# EAGLE board TestBench (EAGLE 6.5.0)

Size 140 x 138.5 mm. Coordinates in mm from the lower left corner, seen from the top.
Outline: 14.96,133.5 14.96,132.5
Outline: 20.04,133.5 20.04,129.96
Outline: 25.12,133.5 25.12,132.5
Outline: 30.2,133.5 30.2,129.96
Outline: 9.88,133.5 9.88,132.5
Outline: 35.28,133.5 35.28,132.5
Outline: 40.36,133.5 40.36,129.96
Outline: 45.44,133.5 45.44,132.5
Outline: 50.52,133.5 50.52,129.96
Outline: 55.6,133.5 55.6,132.5
Outline: 60.68,133.5 60.68,129.96
Outline: 65.76,133.5 65.76,132.5
Outline: 75.92,133.5 75.92,132.5
Outline: 70.84,133.5 70.84,129.96
Outline: 81,133.5 81,129.96
Outline: 86.08,133.5 86.08,132.5
Outline: 91.16,133.5 91.16,129.96
Outline: 96.24,133.5 96.24,132.5
Outline: 101.32,133.5 101.32,129.96
Outline: 14.96,6.1 14.96,5.1
Outline: 20.04,8.64 20.04,5.1
Outline: 25.12,6.1 25.12,5.1
Outline: 30.2,8.64 30.2,5.1
Outline: 35.28,6.1 35.28,5.1
Outline: 40.36,8.64 40.36,5.1
Outline: 45.44,6.1 45.44,5.1
Outline: 50.52,8.64 50.52,5.1
Outline: 55.6,6.1 55.6,5.1
Outline: 60.68,8.64 60.68,5.1
Outline: 65.76,6.1 65.76,5.1
Outline: 75.92,6.1 75.92,5.1
Outline: 70.84,8.64 70.84,5.1
Outline: 81,8.64 81,5.1
Outline: 86.08,6.1 86.08,5.1
Outline: 91.16,8.64 91.16,5.1
Outline: 96.24,6.1 96.24,5.1
Outline: 101.32,8.64 101.32,5.1
Outline: 9.88,8.64 9.88,5.1
Outline: 0,135.5 0,3 arc90 3,0 137,0 arc90 140,3 140,135.5 arc90 137,138.5 3,138.5 arc90 0,135.5
Outline: 10,15 10,123.5 101.32,123.5 101.32,15 10,15
Copper layers (1*16): Top 0.035mm / dielectric 1.5mm / Bottom 0.035mm
Design rules "default": minimum track width 10mil, minimum drill 24mil, track to track 8mil, track to pad 8mil, pad to pad 8mil, via to via 8mil, smd to smd 8mil, copper to edge 40mil, drill to drill 8mil, minimum pad ring 10mil, minimum via ring 8mil, stop-mask expansion 4mil, vias tented up to drill 0mil, thermal gap 10mil
Holes 3.2 mm at 3,135.5 137,135.5 70,3 3,3 70,135.5 137,3 12.42,8 12.42,130.5 17.5,8 17.5,130.5 22.58,8 22.58,130.5 27.66,8 27.66,130.5 32.74,8 32.74,130.5 37.82,8 37.82,130.5 42.9,8 42.9,130.5 47.98,8 47.98,130.5 53.06,8 53.06,130.5 58.14,8 58.14,130.5 63.22,8 63.22,130.5 68.3,8 68.3,130.5 73.38,8 73.38,130.5 78.46,8 78.46,130.5 83.54,8 83.54,130.5 88.62,8 88.62,130.5 93.7,8 93.7,130.5 98.78,8 98.78,130.5

## Footprints (pad centres in the part's own frame; a part is rotated, then mirrored left to right if it is on the bottom)
DC_BARREL_JACK_PTH_2MM = drill 3.5: P1 0,6.475 | drill 3: P2 4.9,3.525; P3 0,0.475
POWER_16 = drill 1.016 pad 1.88 octagon: 1 -6.35,-1.27; 2 -6.35,1.27; 3 -3.81,-1.27; 4 -3.81,1.27; 5 -1.27,-1.27; 6 -1.27,1.27; 7 1.27,-1.27; 8 1.27,1.27; 9 3.81,-1.27; 10 3.81,1.27; 11 6.35,-1.27; 12 6.35,1.27; 13 8.89,-1.27; 14 8.89,1.27; 15 11.43,-1.27; 16 11.43,1.27
PROTO_10_24 = drill 1 square: 1 -13.97,-11.43; 2 -11.43,-11.43; 3 -8.89,-11.43; 4 -6.35,-11.43; 5 -3.81,-11.43; 6 -1.27,-11.43; 7 1.27,-11.43; 8 3.81,-11.43; 9 6.35,-11.43; 10 8.89,-11.43; 11 11.43,-11.43; 12 13.97,-11.43; 25 -13.97,-8.89; 26 -11.43,-8.89; 27 -8.89,-8.89; 28 -6.35,-8.89; 29 -3.81,-8.89; 30 -1.27,-8.89; 31 1.27,-8.89; 32 3.81,-8.89; 33 6.35,-8.89; 34 8.89,-8.89; 35 11.43,-8.89; 36 13.97,-8.89; 49 -13.97,-6.35; 50 -11.43,-6.35; 51 -8.89,-6.35; 52 -6.35,-6.35; 53 -3.81,-6.35; 54 -1.27,-6.35; 55 1.27,-6.35; 56 3.81,-6.35; 57 6.35,-6.35; 58 8.89,-6.35; 59 11.43,-6.35; 60 13.97,-6.35; 73 -13.97,-3.81; 74 -11.43,-3.81; 75 -8.89,-3.81; 76 -6.35,-3.81; 77 -3.81,-3.81; 78 -1.27,-3.81; 79 1.27,-3.81; 80 3.81,-3.81; 81 6.35,-3.81; 82 8.89,-3.81; 83 11.43,-3.81; 84 13.97,-3.81; 97 -13.97,-1.27; 98 -11.43,-1.27; 99 -8.89,-1.27; 100 -6.35,-1.27; 101 -3.81,-1.27; 102 -1.27,-1.27; 103 1.27,-1.27; 104 3.81,-1.27; 105 6.35,-1.27; 106 8.89,-1.27; 107 11.43,-1.27; 108 13.97,-1.27; 121 -13.97,1.27; 122 -11.43,1.27; 123 -8.89,1.27; 124 -6.35,1.27; 125 -3.81,1.27; 126 -1.27,1.27; 127 1.27,1.27; 128 3.81,1.27; 129 6.35,1.27; 130 8.89,1.27; 131 11.43,1.27; 132 13.97,1.27; 145 -13.97,3.81; 146 -11.43,3.81; 147 -8.89,3.81; 148 -6.35,3.81; 149 -3.81,3.81; 150 -1.27,3.81; 151 1.27,3.81; 152 3.81,3.81; 153 6.35,3.81; 154 8.89,3.81; 155 11.43,3.81; 156 13.97,3.81; 169 -13.97,6.35; 170 -11.43,6.35; 171 -8.89,6.35; 172 -6.35,6.35; 173 -3.81,6.35; 174 -1.27,6.35; 175 1.27,6.35; 176 3.81,6.35; 177 6.35,6.35; 178 8.89,6.35; 179 11.43,6.35; 180 13.97,6.35; 193 -13.97,8.89; 194 -11.43,8.89; 195 -8.89,8.89; 196 -6.35,8.89; 197 -3.81,8.89; 198 -1.27,8.89; 199 1.27,8.89; 200 3.81,8.89; 201 6.35,8.89; 202 8.89,8.89; 203 11.43,8.89; 204 13.97,8.89; 217 -13.97,11.43; 218 -11.43,11.43; 219 -8.89,11.43; 220 -6.35,11.43; 221 -3.81,11.43; 222 -1.27,11.43; 223 1.27,11.43; 224 3.81,11.43; 225 6.35,11.43; 226 8.89,11.43; 227 11.43,11.43; 228 13.97,11.43; G30 -13.97,13.97; G31 -11.43,13.97; G32 -8.89,13.97; G33 -6.35,13.97; G34 -3.81,13.97; G35 -1.27,13.97; G36 1.27,13.97; G37 3.81,13.97; G38 6.35,13.97; G39 8.89,13.97; G40 -13.97,-13.97; G41 -11.43,-13.97; G42 -8.89,-13.97; G43 -6.35,-13.97; G44 -3.81,-13.97; G45 -1.27,-13.97; G46 1.27,-13.97; G47 3.81,-13.97; G48 6.35,-13.97; G49 8.89,-13.97; G310 11.43,13.97; G311 13.97,13.97; G410 11.43,-13.97; G411 13.97,-13.97; V30 -13.97,16.51; V31 -11.43,16.51; V32 -8.89,16.51; V33 -6.35,16.51; V34 -3.81,16.51; V35 -1.27,16.51; V36 1.27,16.51; V37 3.81,16.51; V38 6.35,16.51; V39 8.89,16.51; V40 -13.97,-16.51; V41 -11.43,-16.51; V42 -8.89,-16.51; V43 -6.35,-16.51; V44 -3.81,-16.51; V45 -1.27,-16.51; V46 1.27,-16.51; V47 3.81,-16.51; V48 6.35,-16.51; V49 8.89,-16.51; V310 11.43,16.51; V311 13.97,16.51; V410 11.43,-16.51; V411 13.97,-16.51
OG-POTS_ALPS_POT_VERTICAL = drill 1 pad 1.88: P$1 -2.58,-6.7; P$2 0,-6.7; P$3 2.58,-6.7 | drill 2.2 pad 3.175: P$4 4.4,0; P$5 -4.4,0
3.5MM-JACK-SWITCH-13MM-OUTPUT = smd 2.5 x 4.5: RING@1 -4.2,0; SWITCH@1 4.2,0 | smd 2.5 x 4.5 bottom: RING@2 -4.2,0; SWITCH@2 4.2,0 | smd 4.5 x 2.5: SECOND@1 0,-3.3; TIP@1 0,4.9 | smd 4.5 x 2.5 bottom: SECOND@2 0,-3.3; TIP@2 0,4.9

## Placement (x,y rotation side)
J1  [DC_BARREL_JACK_PTH_2MM]  129,135 180 top
U$1  POWER  [POWER_16]  114.3,115.57 270 bottom
U$2  POWER  [POWER_16]  125.73,115.57 270 top
U$3  PROTOAREA  [PROTO_10_24]  31,41 0 top
U$4  [OG-POTS_ALPS_POT_VERTICAL]  130,15 0 top
U$5  [OG-POTS_ALPS_POT_VERTICAL]  130,35 0 top
U$6  [OG-POTS_ALPS_POT_VERTICAL]  130,55 0 top
U$7  [OG-POTS_ALPS_POT_VERTICAL]  130,75 0 top
U$8  AUDIO-JACKOUTPUT  [3.5MM-JACK-SWITCH-13MM-OUTPUT]  110,75 0 top
U$9  AUDIO-JACKOUTPUT  [3.5MM-JACK-SWITCH-13MM-OUTPUT]  110,55 0 top
U$10  AUDIO-JACKOUTPUT  [3.5MM-JACK-SWITCH-13MM-OUTPUT]  110,35 0 top
U$11  AUDIO-JACKOUTPUT  [3.5MM-JACK-SWITCH-13MM-OUTPUT]  110,15 0 top

## Library data of the parts
J1 = dp_devices
U$1 U$2 U$4-U$11 = EurorackModularParts
U$3 = zephod-components

## Nets
N$1: U$1.9 U$1.10 U$2.9 U$2.10
N$2: U$1.3 U$1.4 U$1.5 U$1.6 U$1.7 U$1.8 U$2.3 U$2.4 U$2.5 U$2.6 U$2.7 U$2.8
N$3: U$1.1 U$1.2 U$2.1 U$2.2
N$4: U$1.11 U$1.12 U$2.11 U$2.12
N$5: U$1.13 U$1.14 U$2.13 U$2.14
N$6: U$1.15 U$1.16 U$2.15 U$2.16

## Tracks (layer width: path | path; a pad name or v marks a point on that pad's centre or on a via)
N$1  (3 unrouted)
N$2  (11 unrouted)
N$3  (3 unrouted)
N$4  (3 unrouted)
N$5  (3 unrouted)
N$6  (3 unrouted)